# Altium PCB motherboard.PcbDoc (part 2 of 2)
Units mm, origin at the board's own origin, x right, y up, seen from the top; angles counter-clockwise.
Board outline 30 x 30 mm, 4 copper layers (Top Layer, Layer 1, Layer 2, Bottom Layer), stack 0.603 mm thick; 93 components, 78 nets, 485 pads, 216 vias.
Unrouted connection lines stored in the file: 1.
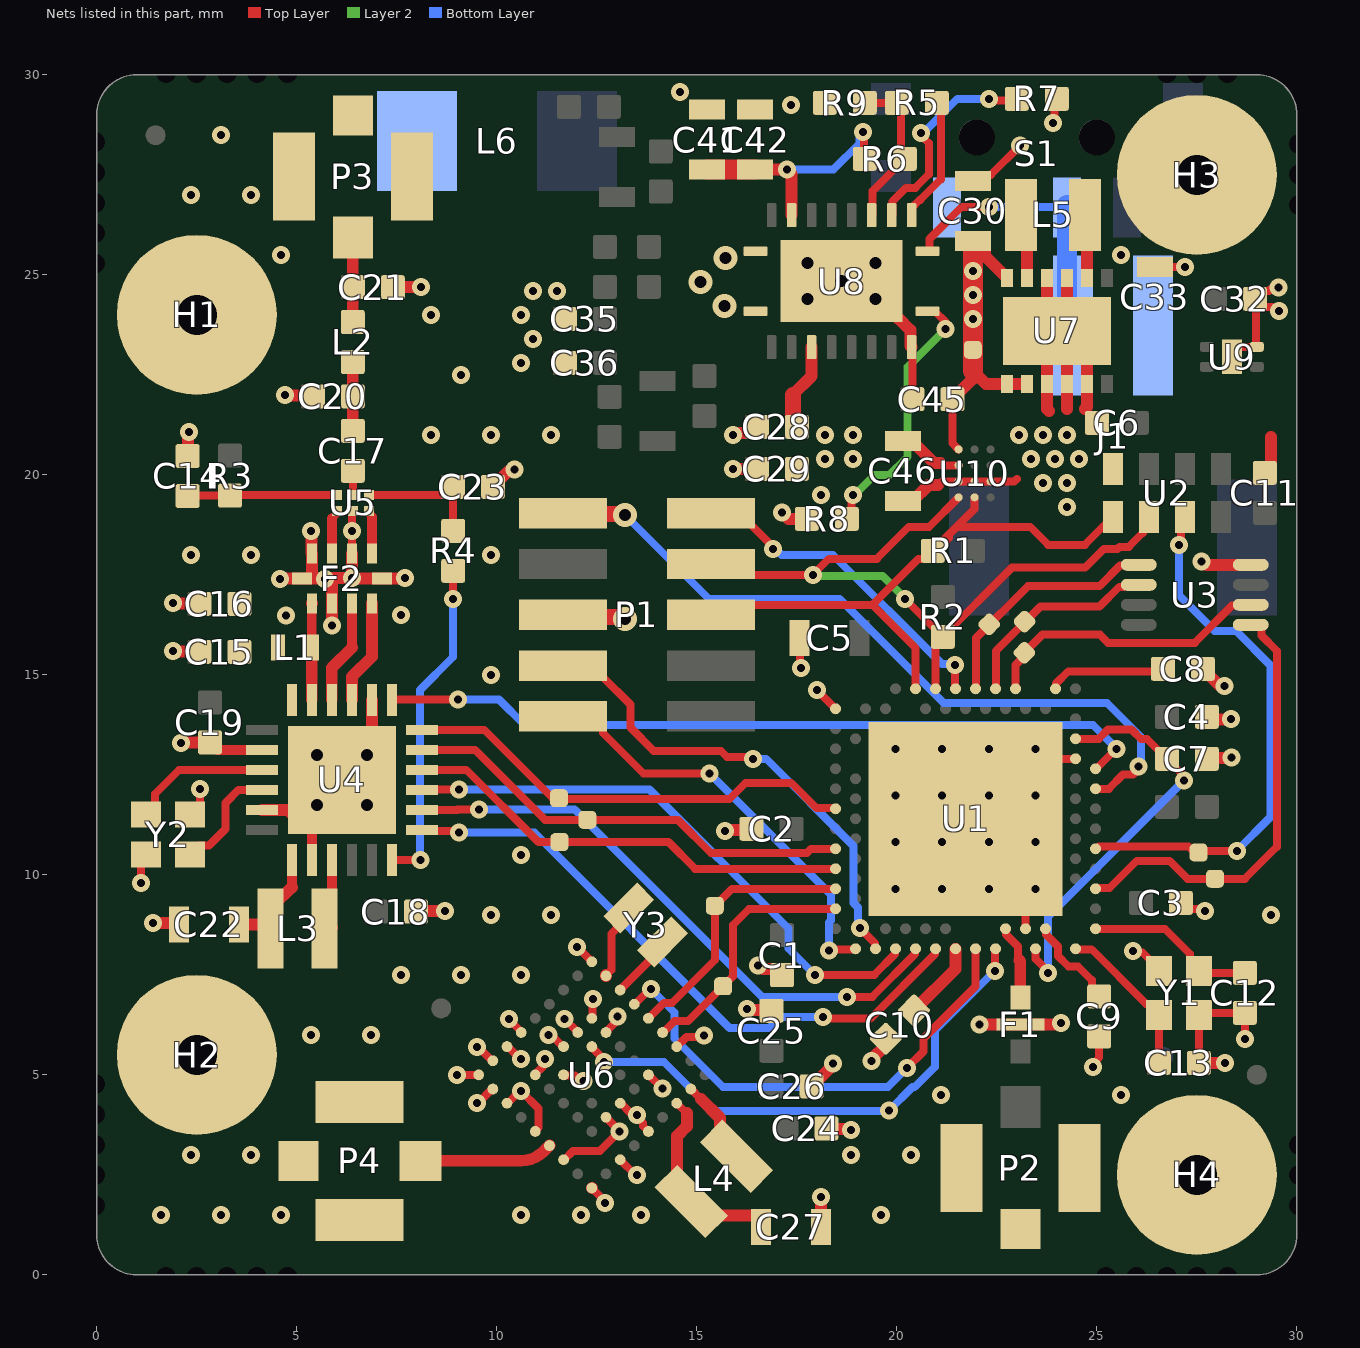
[diagram p4: the nets of this part, all layers, seen from the top]

## Via types
v1: diameter 0.45, hole 0.2, Top Layer to Bottom Layer, tented both sides, 196 vias
v2: diameter 0.45, hole 0.2, Top Layer to Bottom Layer, tented bottom, 10 vias
v3: diameter 0.6, hole 0.3, Top Layer to Bottom Layer, tented both sides, 10 vias

## Nets (pads, with @x,y where several pads share a name; then routed paths per layer and width w, separated by ;. In a path a pad name is that pad's centre, name@x,y a point inside that pad or via, vN(x,y) a via of type N, cw(c..) or ccw(c..) an arc to the next point about the centre after c; other vN are vias at no path point) (continued)
FLASH_MISO: pad.2@23.19,15.55 U1.G1 U3.2 | length 7.3
  Top Layer w0.2: U1.G1@22.97,14.65 22.97,15.247 23.231,15.509 23.231,15.591 23.644,16.004 25.076,16.004 25.28,15.8 27.45,15.8 28.381,16.731 28.831,16.731 U3.2@28.85,16.75
FLASH_MOSI: pad.2@22.31,16.26 U1.L1 U3.5 | length 6.1
  Top Layer w0.2: U1.L1@21.97,14.65 21.984,14.664 21.984,15.919 23.28,17.215 25.065,17.215 25.581,17.731 26.031,17.731 U3.5@26.05,17.75
FLASH_NCS: pad.2@27.955,9.9 U1.A20 U3.1 | length 11.3
  Top Layer w0.2: U1.A20@24.97,9.65 24.984,9.664 25.314,9.664 26,10.35 26.815,10.35 27.265,9.9 28.7,9.9 29.5,10.7 29.5,15.6 29.118,15.982 29.118,16.204 29.072,16.25 U3.1@28.85,16.25
FLASH_SCLK: pad.2@23.195,16.33 U1.J1 U3.6 | length 5.2
  Top Layer w0.2: U1.J1@22.47,14.65 22.484,14.664 22.484,15.599 23.59,16.705 25.069,16.705 25.564,17.2 25.673,17.2 25.704,17.231 26.031,17.231 U3.6@26.05,17.25
FOD: R5.2 R6.1 R9.1 U8.14 | length 4
  Top Layer w0.2: R9.1@19.2,29.3 R5.2@20,29.3 20.1,29.2 20.1,28 R6.1@20.2,27.9 19.39,27.09 19.39,26.51 U8.14@19.37,26.49
G_ANT: P4.1 U6.A4 | length 3.3
  Top Layer w0.293: P4.1@8.095,2.85 10.603,2.85 ccw(c10.603,3.657) 11.174,3.086 U6.A4@11.317,3.229
GND: C1.1 C2.1 C3.1 C4.1 C5.1 C6.1 C7.1 C8.1 C9.1 C10.1 C11.1 C12.1 C13.1 C14.1 C15.1 C16.1 C18.1 C19.2 C20.1 C21.1 C22.1 C23.1 C24.1 C25.1 C26.1 C27.1 C28.1 C29.1 C30.1 C32.1 C33.1 C41.1 C42.1 C45.1 C46.1 F1.2 F2.2 F2.5 F2.7 F2.9 F2.10 H1.1 H2.1 H3.1 H4.1 J1.2 P1.5 P2.2 P2.3 P2.4 P3.2 P3.3 P3.4 P4.2 P4.3 P4.4 R7.2 R8.2 R9.2 U1.AD2 U1.B7 U1.DP1 U1.F23 U2.5 U3.4 U4.0 U4.2 U4.5 U4.8 U4.20 U5.2 U6.A1 U6.A3 U6.A5 U6.A7 U6.A8 U6.A9 U6.B9 U6.C1 U6.C7 U6.C9 U6.D3 U6.D6 U6.D9 U6.E1 U6.E3 U6.E7 U6.F7 U6.G3 U6.G6 U6.G7 U6.J3 U6.J9 U7.3 U7.4 U7.5 U7.9 U7.10 U7.13 U8.0 U8.1 U8.9 U8.20 U9.2 U9.EP1 U10.A2 U10.B2 U10.C2 Y1.2 Y1.4 Y2.2 Y2.4 | length 80.5
  Top Layer w0.2: v1(1.1,9.8) 1.1,10.38 Y2.2@1.23,10.51 ; Y2.4@2.33,11.51 2.355,11.51 2.58,11.735 v1(2.58,12.146) ; F2.7@6.38,18.035 v1(6.38,18.6) ; U5.2@6.38,19.01 6.38,18.62 v1@6.4,18.6 ; v1(9,5) 9.001,4.999 9.547,4.999 U6.A9@9.549,4.997 ; v1(9.5,4.3) 9.54,4.3 9.884,4.644 U6.A8@9.902,4.644 ; v1(9.5,5.7) 9.534,5.7 9.884,5.351 U6.B9@9.902,5.351 ; U6.A7@10.256,4.29 10.273,4.29 10.583,4.6 v1(10.6,4.6) 11.045,4.155 11.045,3.683 10.963,3.602 U6.A5@10.963,3.583 ; U6.C9@10.256,5.704 10.275,5.704 10.579,5.4 v1(10.6,5.4) ; v1(10.3,6.4) 10.3,6.384 10.61,6.074 U6.D9@10.61,6.058 ; U6.C7@10.963,4.997 10.963,5.016 11.152,5.205 11.152,5.352 v1(11.2,5.4) ; v1(11.289,5.991) 11.336,5.943 11.413,5.943 11.651,5.704 U6.E7@11.67,5.704 ; U6.A3@11.67,2.876 11.689,2.876 11.908,3.095 12.577,3.095 v1(13.068,3.586) 13.068,3.593 12.731,3.93 U6.D3@12.731,3.936 ; U6.D6@11.67,4.997 11.684,4.984 11.959,4.984 12.105,4.838 v1(12.163,4.838) ; v1(11.699,6.399) 11.699,6.39 12.024,6.066 U6.F7@12.024,6.058 ; v1@12.003,8.2 U6.J9@12.377,7.825 ; U6.A1@12.377,2.163 v1@12.7,1.841 ; U6.G7@12.377,6.411 12.389,6.423 12.389,6.889 v1(12.4,6.9) ; U6.G6@12.744,6.071 12.744,6.09 12.976,6.322 12.976,6.412 v1(13.024,6.46) ; U6.C1@13.084,2.876 v1@13.46,2.5 ; U6.E3@13.084,4.29 13.103,4.29 13.346,4.048 13.452,4.048 v1(13.5,4) ; v1@13.5,3.959 13.66,3.799 13.66,3.714 U6.E1@13.792,3.583 ; U6.G3@13.792,4.997 13.801,4.997 14.135,4.663 v1(14.145,4.663) ; U6.J3@14.499,5.704 14.742,5.948 v1@15.148,5.948 ; C5.1@17.57,15.92 17.585,15.905 17.585,15.185 v1(17.6,15.17) ; v1(18,14.615) 18.002,14.615 18.467,14.15 U1.AD2@18.47,14.15 ; U8.9@20.37,23.19 20.37,23.01 20.39,22.99 C45.1@20.39,21.89 ; 21.035,19.745 21.125,19.835 U10.A2@21.545,19.835 U10.B2@21.945,19.835 U10.C2@22.345,19.835 22.935,19.835 23,19.9 ; C30.1@21.9,27.35 22.05,27.5 22.35,27.5 v1(23.085,28.235) ; U1.F23@23.22,8.65 23.22,9.1 U1.DP1@23.25,9.13 ; v1(23.9,28.8) 23.948,28.848 23.948,29.348 R7.2@24,29.4 ; U1.DP1@24.065,12.9 U1.B7@24.47,12.9 U1.B7@24.484,12.914 ; v1(24.9,5.2) 24.9,5.268 25.06,5.428 C9.1@25.06,5.96 ; v1(25.9,8.1) 25.948,8.052 26.148,8.052 26.55,7.65 Y1.4@26.55,7.58 ; C33.1@26.45,25.2 v1(27.2,25.2) ; C3.1@27.175,9.425 27.175,9.273 27.3,9.148 27.652,9.148 v1(27.7,9.1) ; C13.1@27.55,5.3 27.55,6.43 Y1.2@27.585,6.465 ; Y1.2@27.55,6.5 27.6,6.55 C12.1@28.7,6.55 v1(28.7,5.9) ; U9.EP1@28.375,22.95 28.375,23.05 28.525,23.2 U9.2@29,23.2 28.975,23.225 C32.1@28.975,24.375 ; v1(29.549,24.679) 29.501,24.631 29.331,24.631 29.3,24.6 29.15,24.6 C32.1@28.95,24.4 C32.1@28.975,24.375 ; v1(29.55,24.1) 29.482,24.1 29.382,24.2 29.15,24.2 C32.1@28.975,24.375
  Top Layer w0.25: C19.2@2.83,13.31 3.015,13.125 U4.2@4.125,13.125 ; U4.8@5.375,10.375 U4.0@5.375,11.625
  Top Layer w0.3: v1(1.4,8.8) 2.01,8.8 C22.1@2.05,8.76 ; v1(1.9,15.6) 1.913,15.587 2.553,15.587 C15.1@2.565,15.575 ; v1(1.9,16.8) 1.913,16.787 2.553,16.787 C16.1@2.565,16.775 ; v1(2.1,13.3) 2.105,13.305 2.825,13.305 C19.2@2.83,13.31 ; C14.1@2.27,20.47 2.285,20.485 2.285,21.055 v1(2.3,21.07) ; U4.5@4.125,11.625 4.776,11.625 U4.0@4.925,11.476 ; v1(4.58,17.4) 4.59,17.41 5.388,17.41 ; v1(4.7,22) 4.72,21.98 5.38,21.98 C20.1@5.4,21.96 ; v1(5.354,18.6) 5.367,18.587 5.367,18.048 F2.9@5.38,18.035 5.38,17.417 5.388,17.41 ; U4.0@5.375,11.625 U4.0@5.5,11.75 ; v1@5.878,16.26 5.879,16.261 F2.2@5.88,16.785 F2.2@5.88,16.785 5.88,17.4 v1@5.89,17.41 ; F2.7@6.38,18.035 v1(6.38,17.415) ; U4.0@6.75,13 6.875,13.125 U4.20@6.875,14.375 ; C21.1@7.4,24.69 7.405,24.695 8.095,24.695 v1(8.1,24.7) ; v1(7.706,17.415) 7.701,17.41 6.385,17.41 v1(6.38,17.415) ; C18.1@7.98,9.08 7.99,9.09 8.69,9.09 v1(8.7,9.1) ; C23.1@9.9,19.7 10.3,20.1 10.418,20.1 v1(10.447,20.129) ; v1(12,8.2) v1@12.003,8.2 ; U6.A1@12.377,2.163 U6.A1@12.377,2.169 ; v1(12.7,1.8) v1@12.7,1.841 ; v1@13.46,2.5 v1(13.5,2.5) ; v1@13.5,3.959 v1(13.5,4) ; v1@15.148,5.948 v1(15.176,5.976) ; v1(15.7,11.1) 15.725,11.125 16.345,11.125 C2.1@16.37,11.15 ; v1(15.9,20.15) C29.1@16.5,20.15 ; v1(15.9,21) 15.941,21 15.991,21.05 16.35,21.05 C28.1@16.5,21.2 ; v1(16.25,6.65) 16.275,6.625 16.845,6.625 C25.1@16.87,6.6 ; v1(16.527,7.727) 16.568,7.727 16.655,7.64 16.98,7.64 C1.1@17.13,7.49 ; v1(17.135,19.062) 17.297,18.9 R8.2@17.75,18.9 ; C26.1@17.87,4.71 18.409,5.249 v1(18.409,5.286) ; C27.1@18.1,1.2 v1(18.1,1.95) ; C24.1@18.24,3.66 18.26,3.641 18.83,3.641 v1(18.85,3.621) ; U8.0@18.595,24.865 U8.0@18.62,24.84 18.701,24.84 19.094,24.447 19.513,24.447 19.58,24.38 19.58,24.361 20.033,23.908 20.049,23.908 20.34,23.617 20.34,23.22 U8.9@20.37,23.19 ; U8.0@19.117,24.84 U8.0@19.117,24.888 ; v1(19.363,5.34) 19.363,5.38 19.723,5.741 C10.1@19.723,5.903 ; U8.0@19.425,24.225 U8.0@19.305,24.225 ; U8.0@19.47,24.39 U8.0@19.305,24.225 ; U8.0@19.5,24.46 19.5,24.42 U8.0@19.305,24.225 ; C46.1@20.19,19.34 20.39,19.34 20.795,19.745 21.035,19.745 ; v1(22.066,6.253) 22.638,6.253 22.64,6.255 F1.2@23.088,6.255 ; P2.4@22.94,1.155 P2.4@22.955,1.14 ; F1.2@23.09,6.255 24.014,6.255 24.059,6.3 v1(24.1,6.3) ; U7.10@23.75,24.925 23.75,23.85 U7.13@24,23.6 ; 23.8,21.6 23.75,21.65 U7.3@23.75,22.275 23.75,23.35 U7.13@24,23.6 ; 24.25,21.65 U7.4@24.25,22.275 24.25,23.35 U7.13@24,23.6 ; U7.9@24.25,24.925 24.25,23.85 U7.13@24,23.6 ; P2.3@24.415,2.675 P2.3@24.415,2.965 ; 24.7,21.65 24.75,21.7 U7.5@24.75,22.275 24.75,22.9 24.05,23.6 U7.13@24,23.6 ; C13.1@27.55,5.3 v1(28.2,5.3) ; v1(27.621,17.829) 27.662,17.829 27.741,17.75 U3.4@28.85,17.75 ; C7.1@27.75,12.83 27.834,12.914 28.357,12.914 v1(28.371,12.928) ; C4.1@27.75,13.88 27.755,13.885 28.345,13.885 v1(28.35,13.89) ; C8.1@27.78,15.01 27.79,15.01 28.05,14.75 28.168,14.75 v1(28.197,14.721) ; C11.1@29.15,20.05 29.15,20 C11.1@29.2,20.05 29.35,20.2 29.35,20.95 ; 5.388,17.41 5.69,17.41 v1(5.7,17.4) 5.715,17.415 v1(6.38,17.415)
  Top Layer w0.4: P1.5@11.53,16.4 11.568,16.438 13.162,16.438 v3(13.2,16.4)
  other v1: 1.6,1.5 3.1,1.5 4.6,1.5 10.6,1.5 12.1,1.5 13.6,1.5 19.6,1.5 2.35,3 3.85,3 18.85,3 20.35,3 21.1,4.5 25.6,4.5 5.35,6 6.85,6 7.6,7.5 9.1,7.5 10.6,7.5 9.85,9 11.35,9 29.35,9 10.6,10.5 9.85,15 5.878,16.235 4.731,16.485 7.6,16.5 2.35,18 3.85,18 9.85,18 24.25,19.2 18.1,19.5 23.65,19.8 24.25,19.8 23.35,20.4 23.95,20.4 24.55,20.4 8.35,21 9.85,21 11.35,21 23.05,21 23.65,21 24.25,21 9.1,22.5 8.35,24 4.6,25.5 25.6,25.5 2.35,27 3.85,27 3.1,28.5 17.35,29.25 14.575,29.575
  other v3: 15.695,24.215 15.095,24.825 15.715,25.415
HAT_ADC: P1.9 U1.A10 | length 18.9
  Top Layer w0.2: U1.A10@24.97,12.15 25.3,12.15 25.654,12.504 25.904,12.504 25.95,12.55 25.95,12.618 v1(26.038,12.706)
  Top Layer w0.4: P1.9@11.63,19 11.65,19.02 13.18,19.02 v3(13.2,19)
  Bottom Layer w0.2: v3(13.2,19) 15.3,16.9 18.568,16.9 21.168,14.3 25.25,14.3 26.1,13.45 26.1,12.768 v1(26.038,12.706)
HAT_I2C_SCL: P1.8 R2.2 U1.R1 U2.3 U10.A1 | length 18.7
  Top Layer w0.2: P1.8@15.35,17.77 15.62,17.5 v1(17.9,17.5) 18.3,17.9 19.5,17.9 20.3,18.7 20.81,18.7 U10.A1@21.545,19.435 ; v1(20.211,16.889) R2.2@21.15,15.95 22.88,17.68 24.71,17.68 25.18,18.15 25.514,18.15 25.564,18.2 25.8,18.2 26.15,18.55 26.15,18.8 U2.3@26.3,18.95 ; U1.R1@20.97,14.65 R2.2@20.97,15.8
  Layer 2 w0.2: v1(17.9,17.5) 17.925,17.475 19.641,17.475 20.211,16.905 v1(20.211,16.889)
HAT_I2C_SDA: P1.6 R1.2 U1.U1 U2.4 U10.B1 | length 15.7
  Top Layer w0.2: P1.6@15.21,16.38 15.58,16.75 19.395,16.75 ; U1.U1@20.47,14.65 20.47,15.675 19.395,16.75 ; R1.2@21.1,18.3 21.183,18.3 21.3,18.417 21.3,18.489 21.511,18.7 23.336,18.7 23.786,18.25 24.7,18.25 U2.4@25.4,18.95 ; U10.B1@21.945,19.435 21.945,19.145 21.505,18.705 21.295,18.495 21.141,18.341 21.05,18.25 R1.2@20.9,18.1 20.7,17.9 20.545,17.9 19.395,16.75
HAT_INT: P1.10 U1.N1 | length 8.3
  Top Layer w0.2: P1.10@15.35,19.04 16.07,19.04 16.9,18.21 v1(16.9,18.15) ; v1(21.45,15.25) 21.46,15.24 21.46,14.66 U1.N1@21.47,14.65
  Bottom Layer w0.2: v1(16.9,18.15) 16.968,18.15 17.118,18 18.4,18 21.129,15.271 21.429,15.271 v1(21.45,15.25)
ILIM: R5.1 U8.12 | length 3.2
  Top Layer w0.2: U8.12@20.37,26.49 20.37,26.67 20.574,26.874 20.587,26.874 21.1,27.387 21.1,29.2 R5.1@21,29.3
L_ANT: C21.2 L2.2 P3.1 | length 2.1
  Top Layer w0.293: L2.2@6.4,23.82 C21.2@6.4,24.69 P3.1@6.4,25.935
NetC7_2: C7.2 U1.B5 U1.E24 | length 10.4
  Top Layer w0.2: U1.E24@23.47,8.15 23.47,7.9 23.798,7.572 v1(23.775,7.549) ; U1.B5@24.47,13.4 25.05,13.4 25.28,13.63 25.87,13.63 26.11,13.39 26.26,13.39 26.775,12.875 26.775,12.825 26.825,12.825 27.135,12.515 27.135,12.404 v1(27.183,12.356)
  Bottom Layer w0.2: v1(23.775,7.549) 23.775,8.948 v1(27.183,12.356)
NetC8_2: C8.2 U1.C1 | length 3.1
  Top Layer w0.2: U1.C1@23.97,14.65 23.984,14.664 23.984,14.783 24.289,15.087 26.703,15.087 C8.2@26.78,15.01
NetC9_2: C9.2 U1.D23 | length 2.4
  Top Layer w0.2: U1.D23@23.72,8.65 23.734,8.636 23.734,8.504 24.033,8.206 24.033,7.969 24.289,7.712 24.526,7.712 24.875,7.364 24.875,7.145 C9.2@25.06,6.96
NetC10_2: C10.2 U1.N24 | length 2
  Top Layer w0.3: C10.2@20.43,6.61 21.47,7.65 U1.N24@21.47,8.15
NetC12_2: C12.2 U1.A23 Y1.1 | length 4.4
  Top Layer w0.2: U1.A23@24.97,8.65 26.7,8.65 27.325,8.025 27.325,7.992 27.325,7.795 Y1.1@27.57,7.55 ; Y1.1@27.55,7.6 27.6,7.55 C12.2@28.7,7.55
NetC13_2: C13.2 U1.B24 Y1.3 | length 4
  Top Layer w0.2: U1.B24@24.47,8.15 24.484,8.136 24.873,8.136 26.234,6.775 26.325,6.775 26.55,6.55 26.55,6.43 C13.2@26.55,5.3
NetC14_2: C14.2 R3.2 U5.4 | length 3.6
  Top Layer w0.2: C14.2@2.27,19.47 2.28,19.48 R3.2@3.33,19.48 3.35,19.5 U5.4@5.9,19.5
NetC17_1: C17.1 U5.5 | length 0.6
  Top Layer w0.2: U5.5@6.4,19.5 C17.1@6.4,20.1
NetC17_2: C17.2 C20.2 L2.1 | length 1.7
  Top Layer w0.293: C17.2@6.4,21.1 C20.2@6.4,21.96 L2.1@6.4,22.82
NetC22_2: C22.2 L3.1 U4.7 | length 2.9
  Top Layer w0.25: 4.875,9.686 U4.7@4.875,10.375
  Top Layer w0.3: C22.2@3.55,8.76 4.405,8.76 4.505,8.66 4.505,9.335 4.68,9.51 4.699,9.51 4.875,9.686
NetC23_2: C23.2 R4.2 U5.6 | length 3.2
  Top Layer w0.2: U5.6@6.9,19.5 8.7,19.5 C23.2@8.9,19.7 8.905,19.695 8.905,18.605 R4.2@8.91,18.6
NetC27_2: C27.2 L4.2 U6.G1 | length 4.9
  Top Layer w0.2: U6.G1@14.499,4.29 14.739,4.05 14.75,4.05
  Top Layer w0.3: 14.75,4.05 14.75,3.71 14.506,3.466 14.506,2.184 L4.2@14.86,1.83 15.214,1.476 16.5,1.476 16.6,1.376 C27.2@16.6,1.2
NetC35_2: C35.2 C36.2 L6.2
  other v1: 10.6,22.8 10.9,23.4 10.6,24 10.9,24.6 11.5,24.6
NetC46_2: C46.2 U10.A3 | length 1.6
  Top Layer w0.2: 21.09,20.29 21.145,20.235 U10.A3@21.545,20.235
  Top Layer w0.3: C46.2@20.19,20.84 20.39,20.84 20.94,20.29 21.09,20.29
NetF1_1: F1.1 U1.H23 | length 1.9
  Top Layer w0.2: U1.H23@22.72,8.65 22.734,8.636 22.734,8.504 23.033,8.206 23.033,7.969 23.07,7.931 23.07,7.861
  Top Layer w0.293: 23.07,7.861 23.09,7.841 F1.1@23.09,6.93
NetF2_1: F2.1 L1.2 U4.23 | length 2.4
  Top Layer w0.243: L1.2@5.378,15.682 F2.1@5.378,16.782
  Top Layer w0.293: U4.23@5.375,14.375 L1.2@5.375,15.68 L1.2@5.378,15.682 ; F2.1@5.378,16.782 F2.1@5.38,16.785
NetF2_3: F2.3 U4.22 | length 2.6
  Top Layer w0.243: 6.38,15.68 F2.3@6.38,16.785
  Top Layer w0.293: U4.22@5.875,14.375 5.875,15.175 6.38,15.68
NetF2_4: F2.4 U4.21 | length 2.6
  Top Layer w0.293: U4.21@6.375,14.375 6.378,14.379 6.378,14.948 6.88,15.45 F2.4@6.88,16.785
NetF2_6: F2.6 U5.1 | length 1.1
  Top Layer w0.2: U5.1@6.8,19.1 6.8,19.027 6.88,18.946
  Top Layer w0.242: F2.6@6.88,18.035 6.88,18.352 ; 6.88,18.353 6.88,18.946
NetF2_8: F2.8 U5.3 | length 1
  Top Layer w0.2: 5.88,18.91 6,19.03 U5.3@6,19.1
  Top Layer w0.242: F2.8@5.88,18.139 5.88,18.352 5.88,18.91
NetL3_2: L3.2 U4.9 | length 1.7
  Top Layer w0.25: L3.2@5.875,8.68 U4.9@5.875,10.375
  Top Layer w0.3: L3.2@5.855,8.66 L3.2@5.875,8.68
NetL4_1: L4.1 U6.H1 | length 2.2
  Top Layer w0.2: U6.H1@14.852,4.644 15.096,4.4 15.1,4.4
  Top Layer w0.3: 15.1,4.4 15.58,3.92 15.58,3.726 15.991,3.315 L4.1@15.991,2.961
NetL5_1: L5.1 U7.11 | length 1.7
  Top Layer w0.3: L5.1@23.1,26.6 23.25,26.45 U7.11@23.25,24.925
NetL5_2: L5.2 U7.8 | length 1.7
  Top Layer w0.3: L5.2@24.7,26.6 24.75,26.55 U7.8@24.75,24.925
NetR4_1: R4.1 U4.12 | length 8.3
  Top Layer w0.2: U4.12@7.375,10.375 v1(8.092,10.375) ; v2@8.905,16.905 R4.1@8.905,17.595
  Bottom Layer w0.2: v1(8.092,10.375) 8.08,10.387 8.08,14.62 8.9,15.44 v2(8.9,16.9)
NetU6_J7: U6.J7 Y3.2 | length 1.6
  Top Layer w0.2: U6.J7@13.084,7.118 Y3.2@14.145,8.179
  Top Layer w0.3: Y3.2@14.145,8.179 Y3.2@14.145,8.32
NetU6_J8: U6.J8 Y3.1 | length 1.9
  Top Layer w0.2: U6.J8@12.731,7.493 12.862,7.625 12.862,8.523 Y3.1@13.297,8.957
  Top Layer w0.3: U6.J8@12.731,7.472 U6.J8@12.731,7.493 ; Y3.1@13.297,8.957 Y3.1@13.297,9.169
R\T\C\_\I\N\T\: pad.2@27.545,10.555 U1.A16 U2.2 | length 13.6
  Top Layer w0.2: U1.A16@24.97,10.65 24.99,10.65 25.053,10.712 27.288,10.712 27.4,10.6 v1(28.5,10.6) ; v1(27.053,18.244) 27.1,18.292 27.1,18.845 27.098,18.848 U2.2@27.2,18.95
  Bottom Layer w0.2: v1(27.053,18.244) 27.05,18.242 27.05,16.995 27.945,16.1 28.477,16.1 29.344,15.234 29.344,11.444 v1(28.5,10.6)
RECT: C41.2 C42.2 R6.2 U8.18 | length 6.3
  Top Layer w0.2: v1(19.162,28.564) 19.181,28.545 19.181,27.919 R6.2@19.2,27.9
  Top Layer w0.3: C42.2@16.46,27.63 v1(17.26,27.63) 17.37,27.52 U8.18@17.37,26.49
  Top Layer w0.5: C41.2@15.26,27.63 C42.2@16.46,27.63
  Bottom Layer w0.2: v1(17.26,27.63) 18.413,27.63 19.073,28.29 19.073,28.408 19.162,28.496 v1(19.162,28.564)
SWDCLK: P1.3 U1.AA24 | length 12.4
  Top Layer w0.2: P1.3@11.51,15.11 12.49,15.11 12.65,14.95 12.65,14.947 13.34,14.257 13.34,13.68 13.92,13.1 15.6,13.1 15.762,12.938 16.362,12.938 v1(16.4,12.9) ; v1(19.076,8.666) 19.456,8.286 19.456,8.164 U1.AA24@19.47,8.15
  Bottom Layer w0.2: v1(16.4,12.9) 16.736,12.9 18.917,10.718 18.917,9.291 19.028,9.18 19.028,8.714 v1(19.076,8.666)
SWDIO: P1.1 U1.AC24 | length 10.8
  Top Layer w0.2: P1.1@11.51,13.84 12.49,13.84 12.65,13.68 12.65,13.55 13.664,12.536 v1(15.32,12.536) ; v1(18.306,8.108) 18.334,8.136 18.956,8.136 U1.AC24@18.97,8.15
  Bottom Layer w0.2: v1(15.32,12.536) 18.354,9.502 18.354,8.862 18.303,8.811 18.303,8.11 v1(18.306,8.108)
SX_BUSY: U1.U24 U4.14 | length 14.9
  Top Layer w0.2: U4.14@8.125,11.625 9.014,11.625 9.018,11.629 v2(9.55,11.629) ; v1(18.75,6.95) 19.389,6.95 20.456,8.017 20.456,8.136 U1.U24@20.47,8.15
  Bottom Layer w0.2: v2(9.55,11.629) 11.948,11.629 16.627,6.95 v1(18.75,6.95)
SX_INT: U1.R24 U4.13 | length 15.8
  Top Layer w0.2: U4.13@8.125,11.125 8.15,11.1 9.004,11.1 v2(9.052,11.052) ; v1(18.15,6.45) 18.198,6.402 19.341,6.402 20.956,8.017 20.956,8.136 U1.R24@20.97,8.15
  Bottom Layer w0.2: v2(9.052,11.052) 10.94,11.052 15.822,6.171 16.812,6.171 17.091,6.45 v1(18.15,6.45)
SX_MISO: pad.2@11.57,10.82 U1.AD18 U4.16 | length 11.4
  Top Layer w0.2: U4.16@8.125,12.625 9.235,12.625 11.04,10.82 14.29,10.82 14.96,10.15 U1.AD18@18.47,10.15
SX_MOSI: pad.2@12.265,11.375 U1.AD16 U4.17 | length 11.5
  Top Layer w0.2: U4.17@8.125,13.125 9.455,13.125 11.21,11.37 14.53,11.37 15.35,10.55 17.759,10.55 17.859,10.65 U1.AD16@18.47,10.65
SX_NRESET: U1.W24 U4.15 | length 14.4
  Top Layer w0.2: U4.15@8.125,12.125 8.127,12.127 9.052,12.127 v2(9.054,12.129) ; v1(17.95,7.5) 19.439,7.5 19.956,8.017 19.956,8.136 U1.W24@19.97,8.15
  Bottom Layer w0.2: v2(9.054,12.129) 13.821,12.129 17.299,8.651 17.299,8.151 v1(17.95,7.5)
SX_NSS: U1.A8 U4.19 | length 19.4
  Top Layer w0.2: U4.19@7.375,14.375 7.38,14.38 v2(9.03,14.38) ; U1.A8@24.97,12.65 24.985,12.65 25.485,13.15 v1(25.492,13.15)
  Bottom Layer w0.2: v2(9.03,14.38) 10.059,14.38 10.689,13.75 24.9,13.75 25.496,13.154 v1(25.492,13.15)
SX_SCK: pad.2@11.555,11.915 U1.AD12 U4.18 | length 11.5
  Top Layer w0.2: U4.18@8.125,13.625 9.685,13.625 11.41,11.9 15.823,11.9 16.223,12.3 17.36,12.3 17.996,11.664 18.456,11.664 U1.AD12@18.47,11.65
TERM: R8.1 U8.10 | length 6.8
  Top Layer w0.2: R8.1@18.75,18.9 18.902,19.052 18.863,19.091 18.863,19.452 v1(18.911,19.5) ; U8.10@20.77,24.09 20.95,24.09 21.223,23.817 v1(21.223,23.648)
  Layer 2 w0.2: v1(18.911,19.5) 18.95,19.5 19.449,19.999 19.82,19.999 20.272,20.451 20.272,22.697 v1(21.223,23.648)
TS: R7.1 U8.13 | length 5.4
  Top Layer w0.2: U8.13@19.87,26.49 19.89,26.51 19.89,26.837 20.227,27.174 20.463,27.174 20.8,27.511 20.8,28.289 20.607,28.482 v1(20.607,28.546) ; v1(22.3,29.4) 22.348,29.352 22.948,29.352 R7.1@23,29.3
  Bottom Layer w0.2: v1(20.607,28.546) 20.66,28.546 21.514,29.4 v1(22.3,29.4)
VBAT: C28.2 C29.2 J1.1 S1.2 U8.4 U8.11 | length 9.2
  Top Layer w0.2: U8.11@20.77,25.59 20.799,25.59 20.819,25.61 20.819,25.893 21.626,26.7 v1(22.3,26.7)
  Top Layer w0.3: 17.4,22 17.87,22.47 U8.4@17.87,23.19
  Top Layer w0.4: C28.2@17.4,21.3 17.4,22
  Bottom Layer w0.2: v1(22.3,26.7) S1.2@24.2,26.7
  Bottom Layer w0.5: S1.2@24.25,26.75 24.25,23.925 J1.1@24.4,23.775
  other v1: 18.2,20.4 18.9,20.4 18.2,21 18.9,21
VBAT_SW: C30.2 C45.2 pad.2@21.9,23.125 S1.1 U7.1 U7.2 U7.12 U10.A4 | length 8.4
  Top Layer w0.2: C45.2@21.39,21.89 21.39,20.79 U10.A4@21.545,20.635
  Top Layer w0.3: C45.2@21.39,21.89 21.9,22.4 21.9,22.6 22.225,22.275 U7.1@22.75,22.275 U7.2@23.25,22.275 ; C30.2@21.9,25.85 22.1,25.85 22.2,25.75 22.2,25.475 22.675,25 22.75,25 U7.12@22.75,24.925
  Top Layer w0.5: 21.9,22.6 v1(21.9,24.5) v1(21.9,25.1) C30.2@21.9,25.85
  other v1: 21.9,23.9
VR_PA: C15.2 C16.2 L1.1 U4.24
XTA: U4.3 Y2.3 | length 3.5
  Top Layer w0.2: Y2.3@1.23,11.51 1.45,11.73 1.45,12.014 2.062,12.625 U4.3@4.125,12.625
XTB: U4.4 Y2.1 | length 2.8
  Top Layer w0.2: Y2.1@2.33,10.51 2.555,10.735 2.805,10.735 3.215,11.145 3.215,11.795 3.545,12.125 U4.4@4.125,12.125
ZOE_NRESET: U1.L24 U6.J6 | length 12.3
  Top Layer w0.2: U6.J6@13.438,6.765 13.451,6.765 13.837,7.15 v1(13.85,7.15) ; v2(20.25,5.17) 20.665,5.585 20.665,5.904 21.97,7.209 U1.L24@21.97,8.15
  Bottom Layer w0.2: v1(13.85,7.15) 14.438,6.562 14.438,5.912 15.65,4.7 19.78,4.7 v2(20.25,5.17)
ZOE_RX: pad.2@15.655,7.215 U1.AD22 U6.J4 | length 6.4
  Top Layer w0.2: U6.J4@14.145,6.058 14.164,6.058 14.445,6.339 14.779,6.339 15.9,7.46 15.9,8.739 16.311,9.15 U1.AD22@18.47,9.15
ZOE_TX: pad.2@15.45,9.225 U1.AD20 U6.J5 | length 6.8
  Top Layer w0.2: U6.J5@13.792,6.411 14.18,6.8 14.385,6.8 15.45,7.865 15.45,9.222 15.878,9.65 U1.AD20@18.47,9.65
ZOE_TX_READY: U1.J24 U6.F6 | length 13.3
  Top Layer w0.2: U6.F6@12.377,5.704 12.377,5.685 12.681,5.382 v1(12.681,5.315) ; v1(22.45,7.6) 22.46,7.61 22.46,8.14 U1.J24@22.47,8.15
  Bottom Layer w0.2: v1(12.681,5.315) 14.185,5.315 15.4,4.1 19.8,4.1 20.391,4.691 20.448,4.691 20.95,5.193 20.95,6.1 v1(22.45,7.6)
  other v2: 19.8,4.11
pads on no net: FID1.1 FID2.1 FID3.1 FID4.1 FID5.1 FID6.1 J1.SHIELD J1.SHIELD1 S1. S1.3 U1.A18 U1.AB2 U1.AC5 U1.AC9 U1.AC11 U1.AC13 U1.AC15 U1.AC17 U1.AC19 U1.AC21 U1.AD4 U1.AD6 U1.B3 U1.B9 U1.B11 U1.B13 U1.B15 U1.B17 U1.B19 U1.D2 U1.H2 U1.K2 U1.M2 U1.P2 U1.P23 U1.T2 U1.T23 U1.V23 U1.Y23 U2.1 U2.8 U4.6 U6.A2 U6.A6 U6.B1 U6.C3 U6.C4 U6.C5 U6.C6 U6.D1 U6.D4 U6.E9 U6.F1 U6.F3 U6.F4 U6.F9 U6.G4 U6.G5 U6.G9 U8.8 U10.B3 U10.B4 U10.C3 U10.C4

## Polygon pours and split planes (outlines as drawn)
GND on Top Layer "GND_TOP_FLOOD" (solid, remove dead copper, pour order 86): 0,30 30,30 30,0 0,0
3V3_SW on Top Layer "3V3_SW_L01_P080" (solid, pour order 80): 27.65,24.562 27.65,25.75 28.75,25.75 29.45,26.45 30,26.45 30,24.7 28.25,24.7 28.25,24.637
3V3 on Top Layer "3V3_L01_P084" (solid, pour order 84): 25.9,24.7 26.45,24.7 26.9,24.25 26.9,23.25 27.3,22.85 27.75,22.85 27.75,22.5 28,22.25 28.75,22.25 28.75,20.9 25.85,20.9 25.85,21.55 25.35,22.05 25.2,22.05 25.2,22.5 25.9,22.5 25.9,24.05
3V3_SW on Top Layer "3V3_ZOE" (solid, remove dead copper, pour order 42): 14.653,5.407 16.69,3.37 17.39,3.37 17.39,3.97 17.08,4.28 17.08,5.87 15.91,5.87 15.682,5.642
GND on Top Layer "GND_BQ_RECT" (solid, remove dead copper, pour order 23): 14.32,30 14.32,29.15 14.67,28.8 18.2,28.8 18.2,30
GND on Top Layer "GND_L01_P079" (solid, pour order 79): 23.6,21.9 24.9,21.9 24.9,21.35 25.4,20.85 25.4,18.85 22.85,18.85 22.85,21.35 23.25,21.35 23.6,21.7
AC1 on Top Layer "Top Layer-AC1" (solid, pour order 67): 12.6,21.9 13.6,22.1 13.6,22.35 16.35,22.35 16.98,22.98 16.98,23.49 15.08,23.49 14.3,24.27 14.3,24.8 12.6,24.8 12.6,22.45
VBAT on Top Layer "VBAT_L01_P064" (solid, pour order 64): 17.4,21.417 17.4,20 19.1,20 19.1,21.417
AC2 on Top Layer "AC2_TOP" (solid, remove dead copper, pour order 61): 14.5,25.7 15,26.2 16.99,26.2 16.99,26.9 15,26.9 14.8,27.1 12.1,27.1 12.1,29.65 9.75,29.65 9.75,27.2 11.25,25.7
NetC35_2 on Top Layer "BQ_VBAT_GND" (solid, remove dead copper, pour order 59): 11.9,25.2 11.9,22.1 10,22.1 10,25.2
VR_PA on Top Layer "PA_SX1262" (solid, remove dead copper, pour order 53): 4.7,16.2 3.9,17 3.3,17 3.3,15.3 3.4,15.3 4.7,14 5,14 5,14.7 4.7,15 4.7,15.5
GND on Top Layer "GND_BQ_PGND" (solid, remove dead copper, pour order 19): 17.095,23.815 17.095,25.865 15.455,25.865 14.685,25.095 14.685,24.51 15.38,23.815
GND on Bottom Layer "GND_L04_P095" (solid, remove dead copper, pour order 95): 0,30 30,30 30,0 0,0
VBAT_SW on Bottom Layer "Bottom Layer-VBAT_SW" (solid, pour order 93): 21.5,23.65 22.3,23.65 22.3,26 21.7,26.6 21.5,26.6 21.35,26.75 20.85,26.75 20.85,26.05 21.5,26.05
VBAT on Bottom Layer "Bottom Layer-VBAT" (solid, pour order 83): 17.9,20 19.8,20 21.9,22.1 24.8,22.1 24.8,25 24,25 24,23.2 21.4,23.2 19.6,21.4 17.9,21.4
AC2 on Bottom Layer "AC2_L04_P072" (solid, pour order 72): 11.6,29.65 9.75,29.65 9.75,27.2 11.25,25.7 12.95,25.7 12.95,27.15
NetC35_2 on Bottom Layer "NETC35_2_L04_P071" (solid, pour order 71): 11.9,25.2 10.95,25.2 9,27.15 9,28.7 7,28.7 7,27.15 7.25,27.15 10,24.4 10,22.1 11.9,22.1
3V3_SW on Layer 2 "3V3_SW_L03_P091" (solid, pour order 91): 0,30 30,30 30,0 0,0
3V3 on Layer 2 "Layer 2-3V3" (solid, pour order 88): 10.194,7.15 27.65,7.15 27.65,10.757 28.591,11.698 28.591,12.459 27.25,13.8 27.25,19.25 28.75,20.75 28.75,22.25 25.1,22.25 20.95,18.1 12.75,18.1
GND on Layer 1 "GND_PLANE_LAYER2" (solid, remove dead copper, pour order 0): 0,0 0,30 30,30 30,0

## Other copper
Top Layer:
  pour cut-out: 18.25,14.85 25.15,14.85 25.2,14.9 25.2,7.9 18.25,7.9

## Silkscreen, mask and mechanical layers (free items; w line width, h text height)
Top Overlay:
  text "GPS" at 1.024,0.824 h1.1
Bottom Overlay:
  text "LoRa" at 4.926,29.196 h1.1 r90
  text "v2.0" at 4.15,3.4 h0.8
  text "Motherboard" at 9.75,2.25 h0.8
  text "Aaron Helmore" at 11.45,1.15 h0.8
  text "BLE" at 26.546,1.054 h1.1
Mechanical 1:
  the board outline again, w0.15
Route Tool Path:
  lines w2: -1,1 ccw(c1,1) 1,-1 ; -1,5.5 -0.95,24.5 ; -1,29 cw(c1,29) 1,31 ; 5.5,-1 24.5,-1 ; 5.5,31 26.05,31 ; 29,-1 ccw(c29,1) 31,1 ; 29,31 cw(c29,29) 31,29 ; 31,4 31,26